# Altium PCB GT502W_M95.PcbDoc (part 1 of 2)
Units mm, origin at the board's own origin, x right, y up, seen from the top; angles counter-clockwise.
Board outline 52.64 x 68.35 mm, 2 copper layers (Top Layer, Bottom Layer), stack 0.268 mm thick; 151 components, 116 nets, 541 pads, 423 vias.
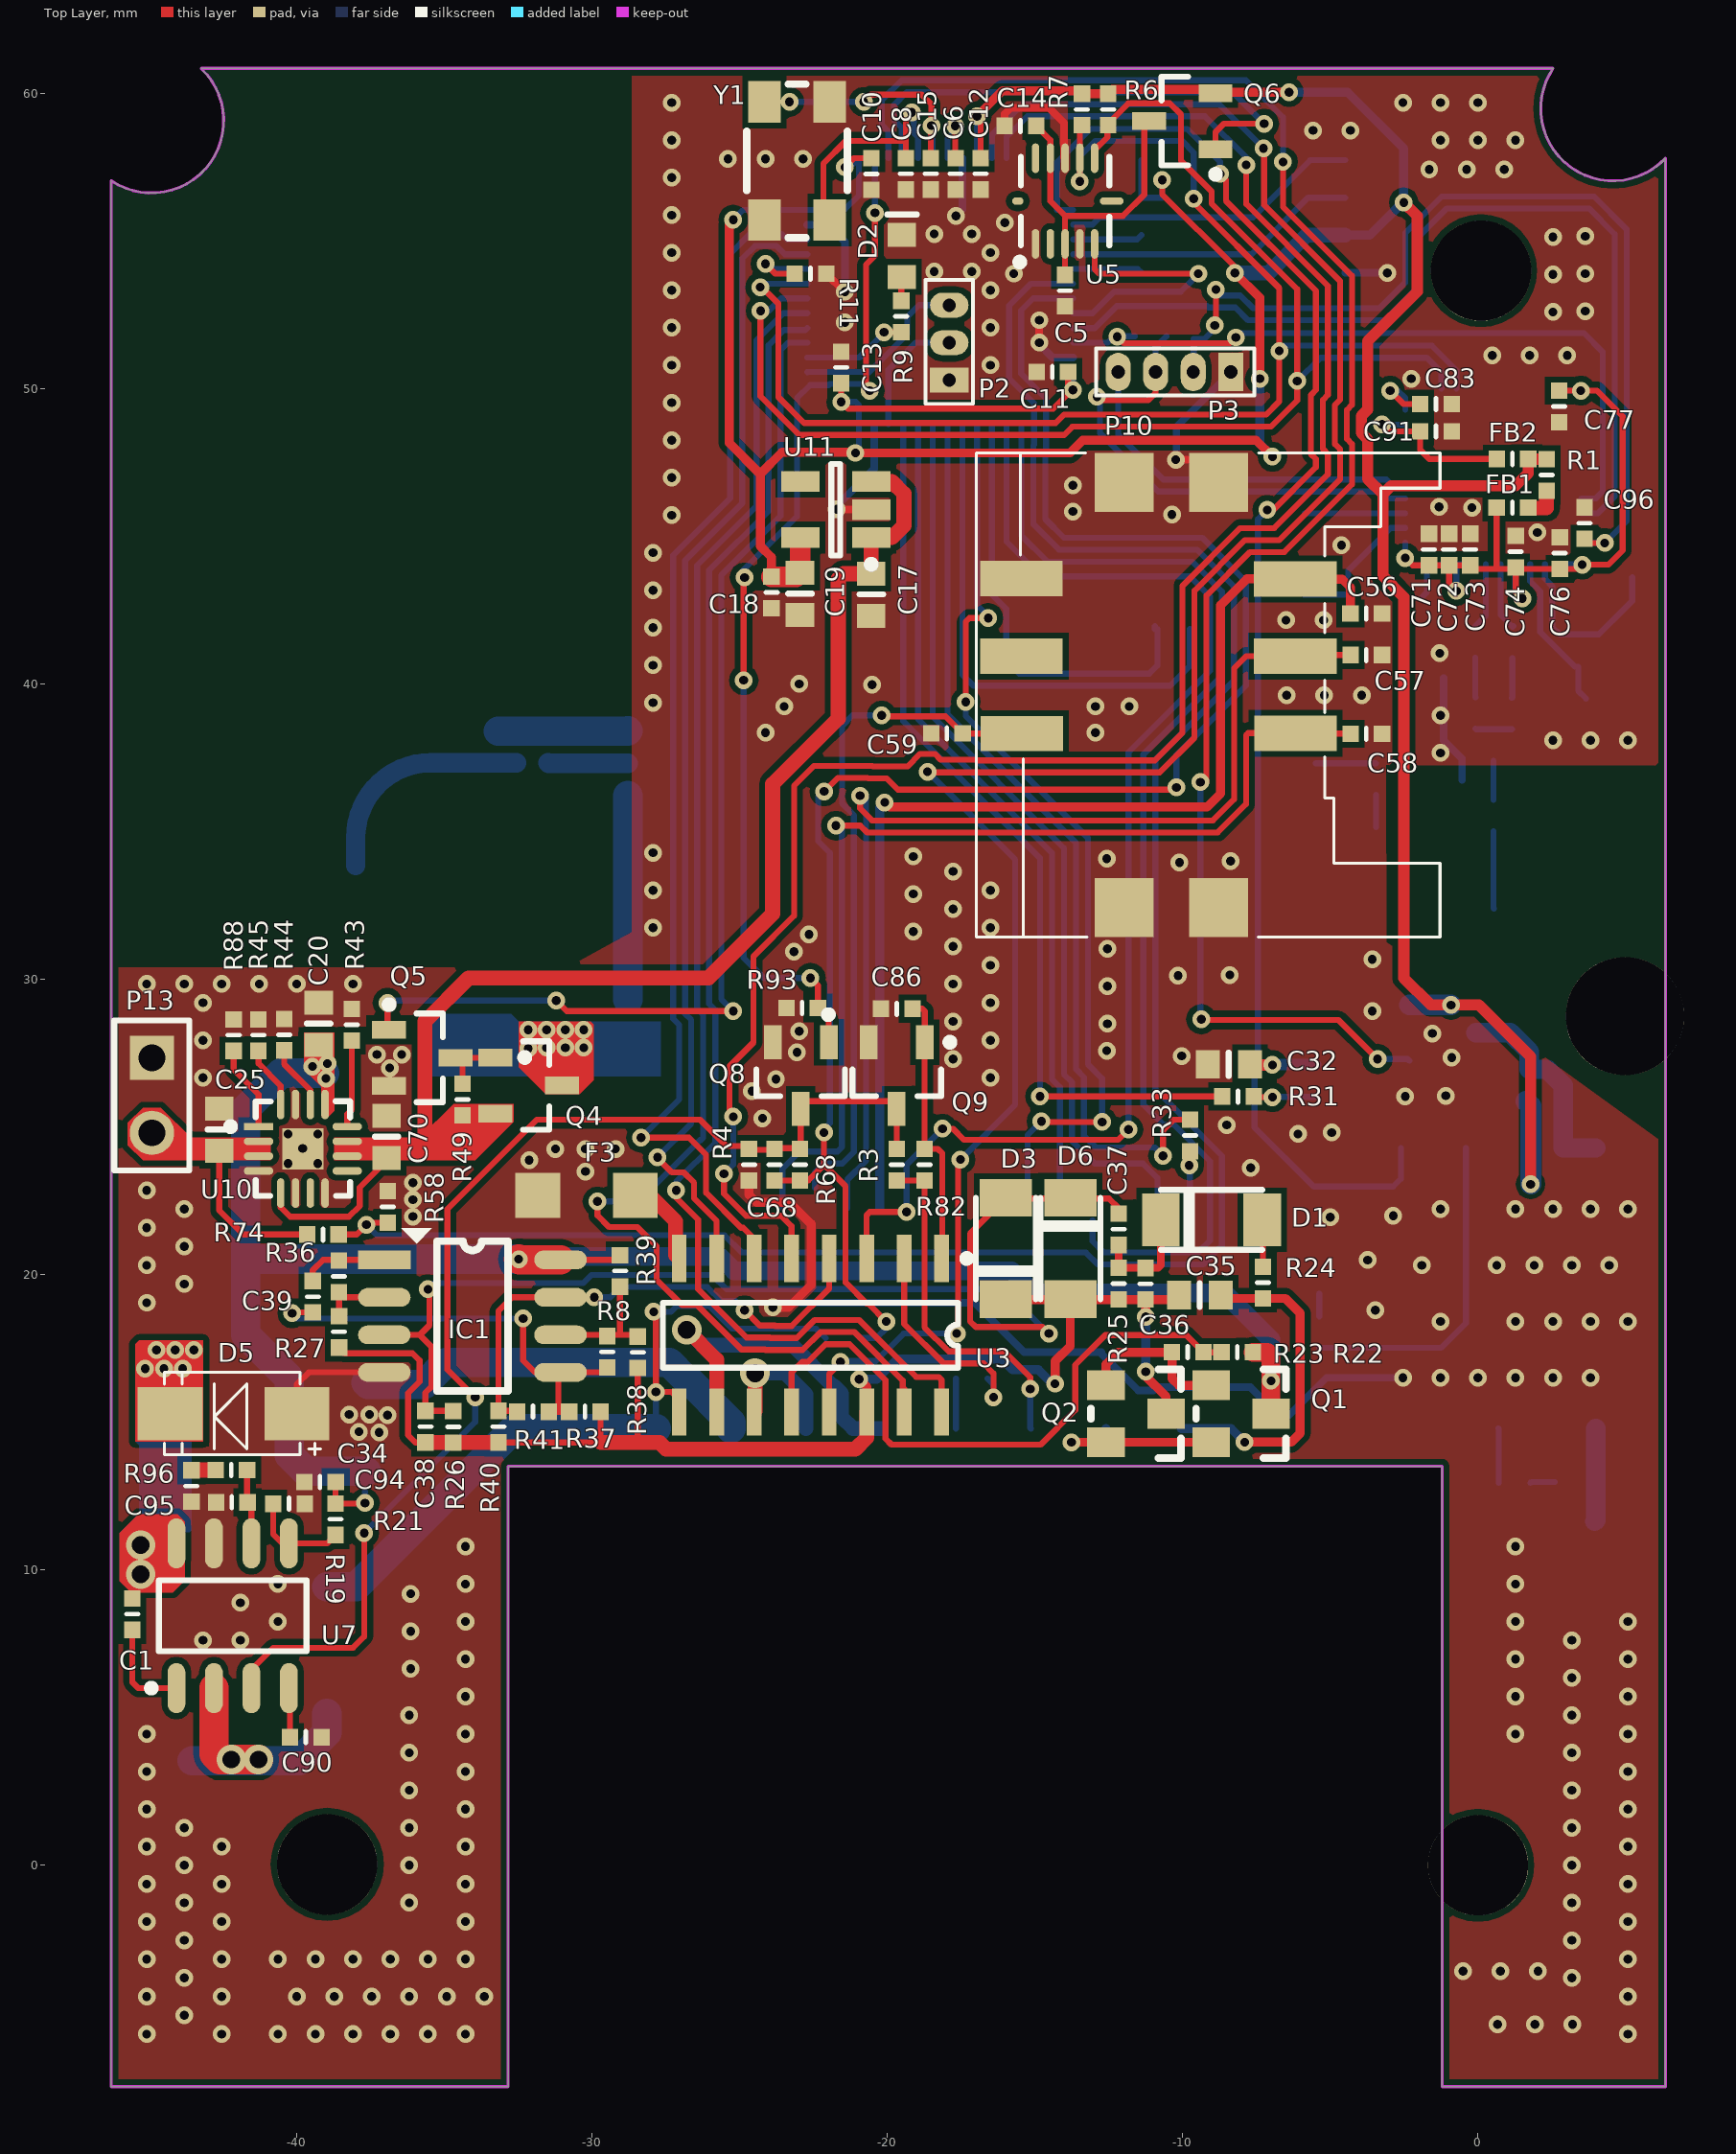
[diagram p0: Top Layer view]
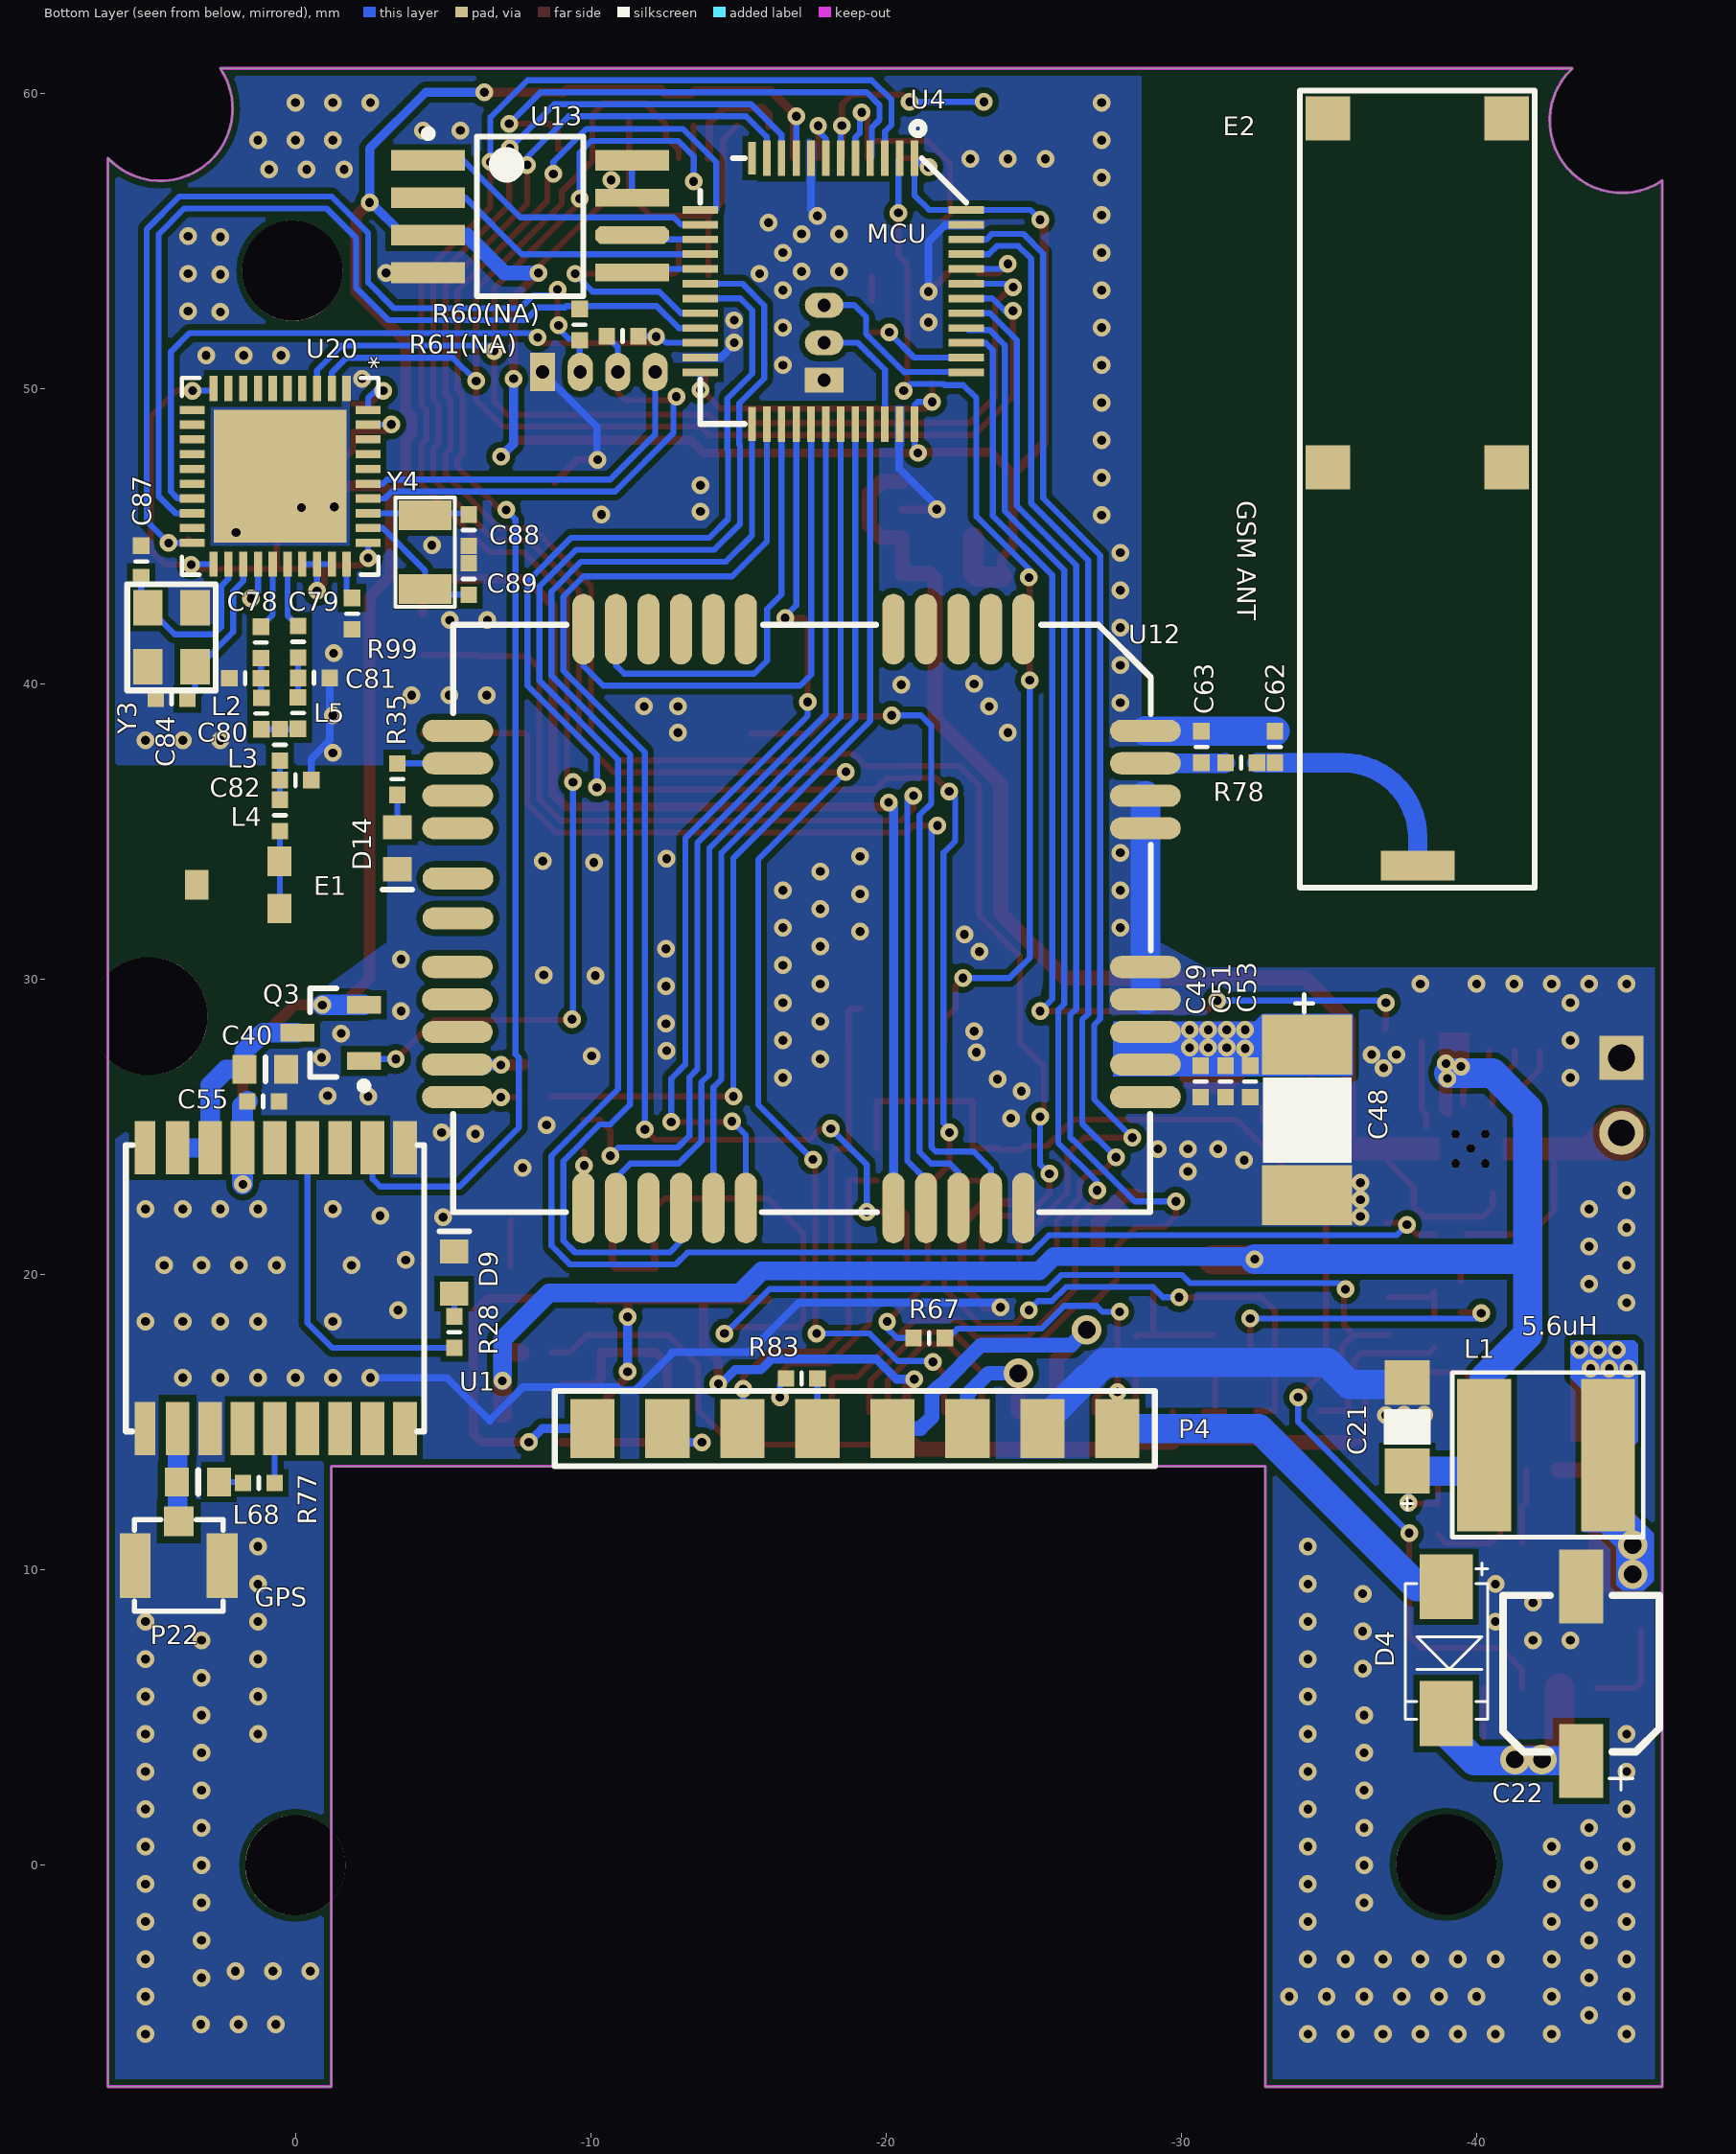
[diagram p1: Bottom Layer view, seen from below]
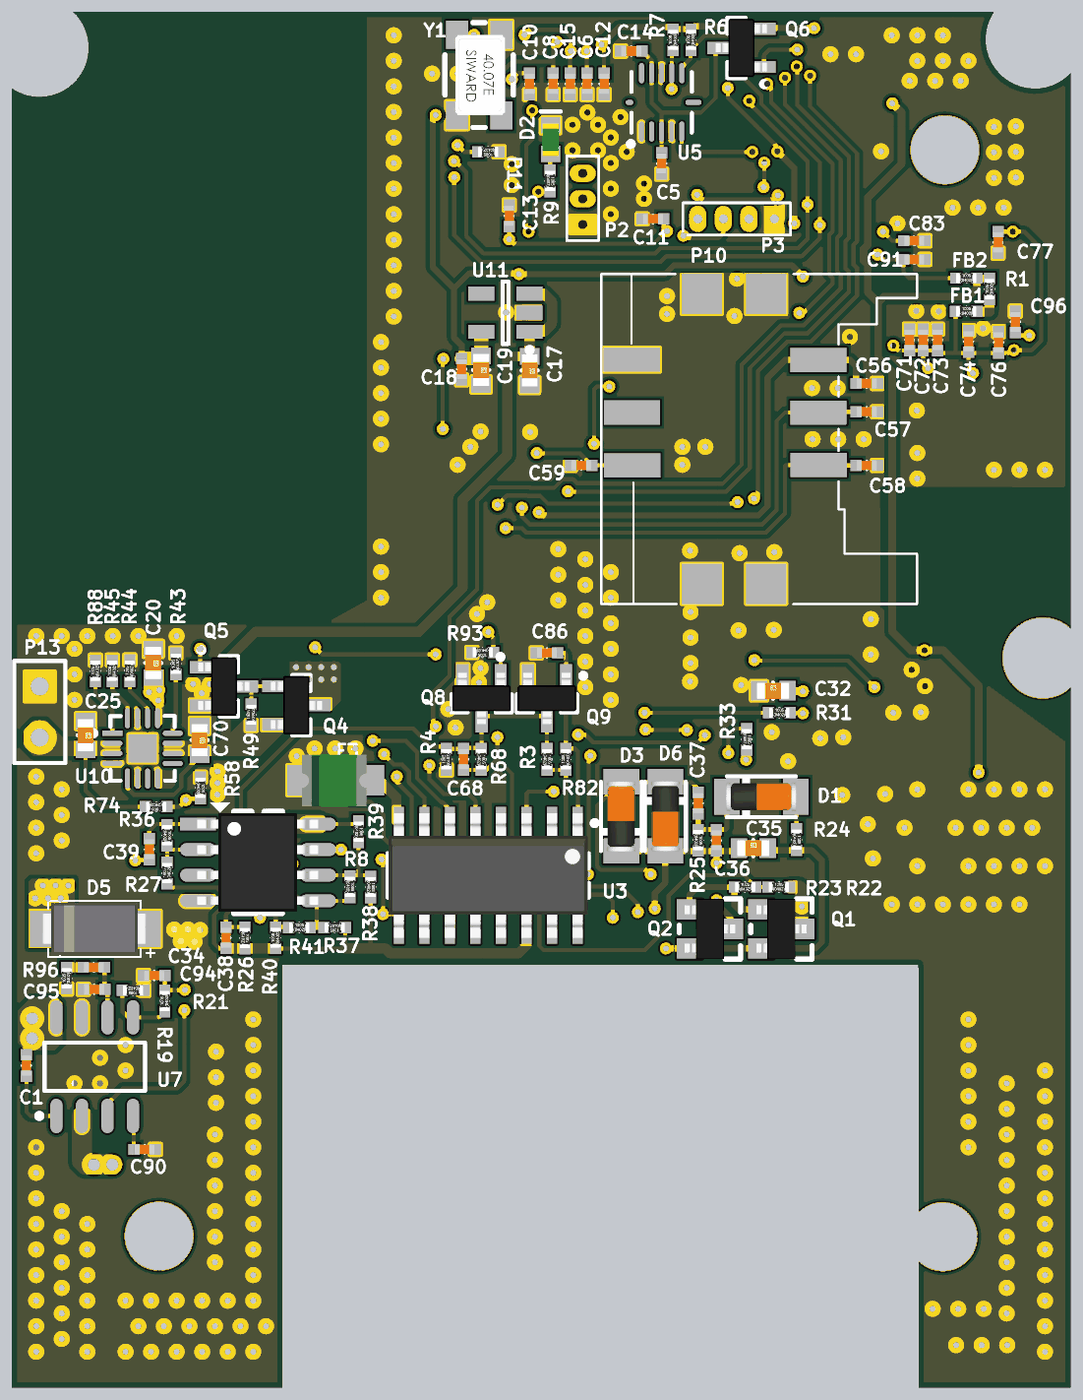
[diagram p3: 3D render of the assembled board from above, using the file's embedded part models]
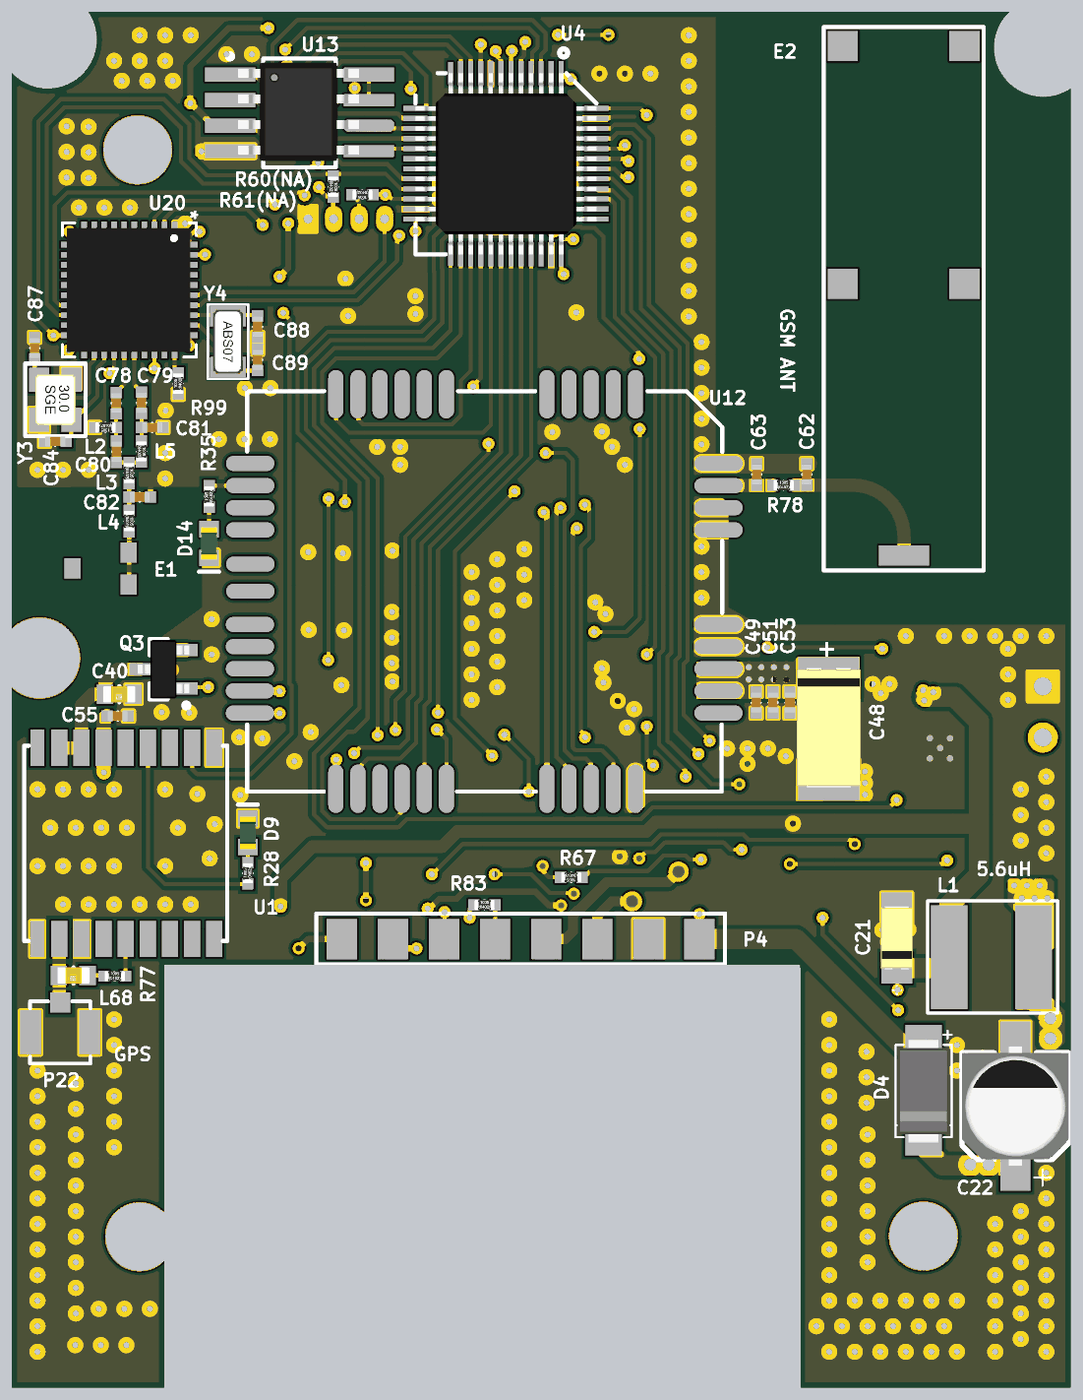
[diagram p4: 3D render of the assembled board from below, using the file's embedded part models]

## Layer stack, top to bottom
Top Layer: signal copper 0.035
Dielectric: core 0.1981, FR-4, Dk 4.2
Bottom Layer: signal copper 0.035

## Board outline
-46.291,-7.497 -46.291,57.048 -46.289,57.048 ccw(c-44.923,59.076) -43.24,60.849 -43.24,60.854 2.543,60.854 2.543,60.852 ccw(c4.57,59.486) 6.343,57.803 6.35,57.797 6.35,-7.497 -1.219,-7.497 -1.219,13.509 -32.842,13.509 -32.842,-7.497

## Design rules (kind name [scope] priority, off if disabled: settings)
Clearance "Schematic Clearance Constraint" [InNet('NetL68_2')] p1: gap=0.254
Clearance [All] p2: gap=0.203
ComponentClearance [All] p1: gap=0 collisioncheckmode=3 verticalgap=0 showdistances=FALSE
HoleSize [All] p1: absolutevalues=TRUE maxlimit=5 minlimit=0.025 maxpercent=80.000 minpercent=20.000
HoleToHoleClearance [All] p1: gap=0.203 allowstackedmicrovias=TRUE
MinimumSolderMaskSliver [All] p1: minsoldermaskwidth=0.003
PolygonConnect pol_conn_style [All vs IsNamedPolygon('Bottom Layer-GND') Or  IsNamedPolygon('Top Layer-GND')] p1: connectstyle=Direct reliefconductorwidth=0.254 reliefentries=4 polygonreliefangle="90 Angle" airgapwidth=0.254
PolygonConnect Pol_Style [All vs IsNamedPolygon('L1_GND') Or  IsNamedPolygon('L3_GND') Or  IsNamedPolygon('L4_GND') Or  IsNamedPolygon('L2_GND')] p2: connectstyle=Direct reliefconductorwidth=0.254 reliefentries=4 polygonreliefangle="90 Angle" airgapwidth=0.254 // V3
PolygonConnect L1-GND-GPS_1 [All vs IsNamedPolygon('L1-GND-GPS')] p3: connectstyle=Direct reliefconductorwidth=0.254 reliefentries=4 polygonreliefangle="90 Angle" airgapwidth=0.254
PolygonConnect L1-L4-GND-POLYGON-STYLE [All vs IsNamedPolygon('L2-GND-PCB') Or  IsNamedPolygon('L4-GND-PCB') Or  IsNamedPolygon('L1-GND-PCB') Or  IsNamedPolygon('L3-GND-PCB')] p4: connectstyle=Direct reliefconductorwidth=0.254 reliefentries=4 polygonreliefangle="90 Angle" airgapwidth=0.254
PolygonConnect GPS-PAD-L1 [All vs IsNamedPolygon('L1-GPS-PAD')] p5: connectstyle=Direct reliefconductorwidth=0.254 reliefentries=4 polygonreliefangle="90 Angle" airgapwidth=0.254
PolygonConnect "GPS PAD" [All vs IsNamedPolygon('L4-GPS-PAD')] p6: connectstyle=Direct reliefconductorwidth=0.254 reliefentries=4 polygonreliefangle="90 Angle" airgapwidth=0.254
PolygonConnect [All vs isvia] p7: connectstyle=Direct reliefconductorwidth=0.254 reliefentries=4 polygonreliefangle="90 Angle" airgapwidth=0.254
RoutingVias ThruVia [All] p1: holewidth=0.3 width=0.6 viastyle="Through Hole" minholewidth=0.3 minwidth=0.6 maxholewidth=1 maxwidth=2
SilkToSilkClearance [All] p1: silktosilkclearance=0
SilkToSolderMaskClearance SilkscreenOverComponentPads [IsPad] p1: minsilkscreentomaskgap=0 clearancetoexposedcopper=TRUE
SolderMaskExpansion SolderMaskExpansion_1 [IsVia] p1: expansion=-0.15
SolderMaskExpansion [All] p2: expansion=0.102
Width "Schematic Width Constraint" [InNet('NetL68_2')] p1: maxlimit=0.66 minlimit=0.66 preferedwidth=0.66
Width [All] p2: maxlimit=1 minlimit=0.203 preferedwidth=0.203
22 further rules are at their usual default settings.

## Classes and differential pairs
component class "Power Supply": C1 C17 C18 C19 C20 C21 C22 C25 C34 C70 C90 C94 C95 D4 D5 L1 P13 Q4 Q5 R19 R21 R43 R44 R45 R49 R58 R74 R88 R96 U7 U10 U11
component class Main: Buzzer1 C5 C6 C8 C10 C11 C12 C13 C14 C15 C35 C36 C37 C38 C39 C68 C71 C72 C73 C74 C76 C77 C78 C79 C80 C81 C82 C83 C84 C86 C87 C88 C89 C91 C96 D1 D2 D3 D6 E1 F3 FB1 FB2 IC1 L2 L3 L4 L5 P2 P3 P4 Q1 Q2 Q6 Q8 Q9 R1 R3 R4 R6 R7 R8 R9 R11 R22 R23 R24 R25 R26 R27 R36 R37 R38 R39 R40 R41 R60(NA) R61(NA) R67 R68 R82 R83 R93 R99 U3 U4 U5 U13 U20 Y1 Y3 Y4
component class GSM/GPS: C32 C40 C41 C48 C49 C51 C53 C55 C56 C57 C58 C59 C62 C63 D9 D14 E2 L68 L69 P10 P22 Q3 R28 R31 R33 R35 R77 R78 U1 U12 U33

## Components (designator, comment, footprint, x,y, rotation, side; value= is the part's Value field where it differs from the comment)
C1 "100nF" C0402 -45.573,8.504 r270 top
C5 "100nF-16V-20%" C0402 -13.984,53.326 r90 top
C6 "100nF-16V-20%" C0402 -17.69,57.279 r270 top
C8 "15p-50V-5%" C0402 -19.377,57.279 r90 top
C10 "100nF-16V-20%" C0402 -20.549,57.277 r270 top
C11 "100nF-16V-20%" C0402 -14.414,50.567 r180 top
C12 "100nF-16V-20%" C0402 -16.847,57.279 r270 top
C13 "100nF-16V-20%" C0402 -21.565,50.724 r90 top
C14 "100nF-16V-20%" C0402 -15.494,58.903 r0 top
C15 "15p-50V-5%" C0402 -18.534,57.279 r270 top
C17 "1uF-16V-20%" C0603 -20.549,43.739 r270 top
C18 "100nF-16V-20%" C0402 -23.927,43.104 r90 top
C19 "1uF-16V-20%" C0603 -22.962,43.764 r270 top
C20 "1uF-16V-20%" C0603 -39.262,29.206 r270 top
C21 "4.7uF" C1206 -37.653,13.447 r90 bottom
C22 "10uF, 35v" "CAPACITOR SIZE_C(D5.3)" -43.544,3.54 r90 bottom
C25 "10uF-6V3-20%" C0603 -42.627,25.617 r270 top
C32 "4.7uF-10V" C0603 -9.144,27.127 r0 top
C34 "1nF-5%" C0402 -42.22,13.386 r0 top
C35 "0.1uF-50V" C0603 -10.131,19.306 r0 top
C36 "3.3nF-10%" C0402 -11.264,19.693 r270 top
C37 "10nF-10%" C0402 -12.168,21.539 r90 top
C38 "2.2nF-10%" C0402 -35.647,14.853 r90 top
C39 "100nF-16V-20%" C0402 -39.46,19.255 r90 top
C40 "10uF-6V3-20%" C0603 0.307,26.953 r0 bottom
C48 "470u-6.3V" C1812 -34.265,27.788 r270 bottom
C49 "100nF-16V-20%" C0402 -30.658,26.543 r270 bottom
C51 "10nF-16V" C0402 -31.496,26.543 r90 bottom
C53 "33pF 50V 5%" C0402 -32.334,26.543 r270 bottom
C55 "100nF-16V-20%" C0402 1.093,25.871 r180 bottom
C56 "100nF-16V-20%" C0402 -3.785,42.393 r0 top
C57 "47p-50V-5%" C0402 -3.784,40.986 r180 top
C58 "47p-50V-5%" C0402 -3.784,38.321 r180 top
C59 "47p-50V-5%" C0402 -17.983,38.329 r0 top
C62 "0.5pF" C0402 -33.172,37.871 r270 bottom
C63 "0.5pF" C0402 -30.683,37.871 r270 bottom
C68 "100nF-16V-20%" C0402 -23.825,23.724 r270 top
C70 "10uF-6V3-20%" C0603 -36.96,25.376 r270 top
C71 "100nF-16V-20%" C0402 -1.662,44.556 r90 top
C72 "100nF-16V-20%" C0402 -0.978,44.556 r90 top
C73 "100nF-16V-20%" C0402 -0.266,44.556 r90 top
C74 "100nF-16V-20%" C0402 1.276,44.486 r90 top
C76 "100nF-16V-20%" C0402 2.77,44.436 r90 top
C77 "100nF-16V-20%" C0402 2.743,49.403 r270 top
C78 "18pF" C0402 1.168,41.412 r270 bottom
C79 "18pF" C0402 -0.094,41.432 r270 bottom
C80 "" C0402 1.15,39.002 r270 bottom
C81 "" C0402 -0.626,40.21 r180 bottom
C82 "" C0402 -0.006,36.748 r180 bottom
C83 "1uF-6V3-20%" C0402 -1.425,49.483 r0 top
C84 "15pF" C0402 4.194,39.512 r180 bottom
C86 "100nF-16V-20%" C0402 -19.685,29.007 r0 top
C87 "15pF" C0402 5.221,44.152 r270 bottom
C88 "18pF" C0402 -5.867,45.212 r90 bottom
C89 "18pF" C0402 -5.867,43.561 r270 bottom
C90 "10nF-10%" C0402 -39.697,4.339 r180 top
C91 "100nF-16V-20%" C0402 -1.425,48.556 r180 top
C94 "100nF" C0402 -39.214,12.98 r0 top
C95 "9pF" C0402 -42.204,12.29 r0 top
C96 "10nF-16V" C0402 3.605,45.452 r270 top
D1 "1N4148" DO-213AA -7.309,21.856 r180 top
D2 "LED GREEN" LED0603-G -19.51,54.504 r90 top
D3 "1N4148" DO-213AA -15.99,22.6 r270 top
D4 "1N4007" "DO-214AC (SMA)" -39.48,8.536 r270 bottom
D5 "B340A" "DO-214AC (SMA)" -40.894,14.8 r180 top
D6 "1N4148" DO-213AA -13.798,19.171 r90 top
D9 "LED GREEN" LED0603-G -5.377,20.07 r90 bottom
D14 "LED GREEN" LED0603-G -3.454,34.442 r270 bottom
E1 "Antenna" A10192-ANTENOVA 1.942,33.201 r0 bottom
E2 "GSM Antena conecter" A10343-GSM850/900/1800/1900/WCDMA -41.968,47.343 r90 bottom
F3 "PTS120616V025" PTC1206 -30.189,22.68 r180 top
FB1 "102" R0402#1 1.165,45.975 r0 top
FB2 "102" R0402#1 1.168,47.625 r0 top
IC1 "LM358" soic8 -37.039,20.503 r0 top locked
L1 "SD8350-5R6-R" SD8350-5R6-R -42.354,13.89 r270 bottom
L2 "2nH" R0402#1 1.701,40.203 r0 bottom
L3 "1nH" R0402#1 0.525,37.942 r270 bottom
L4 "3nH" R0402#1 0.525,35.554 r270 bottom
L5 "2nH" R0402#1 -0.085,39.018 r270 bottom
L68 "47nH" C0603 2.591,12.979 r0 bottom
P2 "Debug" HEADER_1.27mm_3PIN -17.907,50.292 r90 top
P3 "ble_dbg" HEADER_1.27mm_4PIN -10.915,50.57 r180 top locked
P4 "Header 8" HDR1X8 -27.836,14.79 r0 bottom locked
P10 "SIM CARD HOLDER" "SIM MF01-412-063X" -16.986,39.635 r180 top locked
P13 "BAT" HDR1X2 -44.909,27.342 r270 top
P22 "IPEX" IPEX 3.951,10.898 r0 bottom
Q1 "J3Y" SOT23_123 -9.042,16.256 r270 top
Q2 "2TY" SOT23_123 -12.598,16.256 r270 top
Q3 "BSS84" SOT23-3 -1.194,28.194 r0 bottom
Q4 "AO3401A" SOT23-3 -32.149,26.406 r0 top
Q5 "BSS138" SOT23-3 -35.752,27.344 r0 top
Q6 "BSS84" SOT23-3 -10.015,59.065 r180 top
Q8 "BSS138" SOT23-3 -22.936,26.746 r270 top
Q9 "BSS138" SOT23-3 -19.685,26.746 r270 top
R1 "0.022R-1%" R0402#1 2.324,47.083 r90 top
R3 "105k-1%" R0402#1 -19.685,23.724 r270 top
R4 "26.1k-1%" R0402#1 -24.689,23.724 r90 top
R6 "4k7-5%" R0402#1 -12.522,59.461 r90 top
R7 "4k7-5%" R0402#1 -13.411,59.461 r90 top
R8 "220k-5%" R0402#1 -29.486,17.39 r270 top
R9 "1k-5%" R0402#1 -19.533,52.451 r270 top
R11 "10k-5%" R0402#1 -22.606,53.899 r180 top
R19 "38.3k-1%" R0402#1 -38.694,11.717 r90 top
R21 "10k-1%" R0402#1 -40.266,12.244 r180 top
R22 "1k-5%" R0402#1 -8.153,17.374 r0 top
R23 "1k-5%" R0402#1 -9.83,17.374 r0 top
R24 "330k-5%" R0402#1 -7.281,19.731 r270 top
R25 "470k-1%" R0402#1 -12.171,19.701 r270 top
R26 "470k-5%" R0402#1 -34.705,14.845 r270 top
R27 "330R-5%" R0402#1 -38.572,18.065 r90 top
R28 "1k-5%" R0402#1 -5.38,18.056 r90 bottom
R31 "1k-5%" R0402#1 -8.128,26.035 r0 top
R33 "1k-5%" R0402#1 -9.754,24.714 r270 top
R35 "1k-5%" R0402#1 -3.454,36.779 r90 bottom
R36 "220k-5%" R0402#1 -38.58,19.945 r270 top
R37 "2.2M-5%" R0402#1 -30.245,15.361 r180 top
R38 "10k-5%" R0402#1 -28.456,17.375 r270 top
R39 "10k-5%" R0402#1 -29.056,20.125 r270 top
R40 "10k-5%" R0402#1 -33.176,14.855 r90 top
R41 "470k-5%" R0402#1 -32.002,15.358 r0 top
R43 "1k1-5%" R0402#1 -38.14,28.464 r90 top
R44 "47k-5%" R0402#1 -40.43,28.126 r90 top
R45 "3k-5%" R0402#1 -41.3,28.114 r90 top
R49 "10k-5%" R0402#1 -34.392,25.933 r90 top
R58 "100k-5%" R0402#1 -36.921,22.297 r270 top
R60(NA) "1k-5%" R0402#1 -9.627,52.172 r270 bottom
R61(NA) "1k-5%" R0402#1 -11.082,51.782 r0 bottom
R67 "100k-5%" R0402#1 -21.463,17.856 r0 bottom
R68 "10k-1%" R0402#1 -22.962,23.724 r270 top
R74 "100k-5%" R0402#1 -39.116,21.361 r180 top
R77 "10R-5%" R0402#1 1.237,12.945 r180 bottom
R78 "0R" R0402#1 -32.029,37.338 r180 bottom
R82 "10k-5%" R0402#1 -18.745,23.724 r90 top
R83 "10k-5%" R0402#1 -17.145,16.485 r180 bottom
R88 "10k-5%" R0402#1 -42.14,28.114 r90 top
R93 "100k-5%" R0402#2 -22.885,29.032 r90 top
R96 "64.9k-1%" R0402#1 -43.57,12.844 r90 top
R99 "56k-5%" R0402#1 -1.92,42.386 r90 bottom
U1 "L70R" MAX7 0.69,19.544 r180 bottom
U3 "ULN2003A/SO" SO16-150mil -22.608,17.949 r180 top locked
U4 "STM32F103CBT6TR" TQFP-48-P0.5 -18.214,53.309 r270 bottom locked
U5 "MMA7660FC" MMA7660FC -13.984,56.359 r90 top locked
U7 "TPS54232" SOIC127P600-8AL -42.174,8.45 r90 top
U10 "bq24073" pq24073 -39.795,24.265 r0 top
U11 "XC6209B332MRN_SOT-25" SOT23-5 -21.749,45.909 r180 top
U12 "M95" M95 -17.136,32.059 r180 bottom locked (schematic designator U1)
U13 "MX25L8005MC-15G_SOP-8L" SO8-200mil -7.949,55.837 r180 bottom locked
U20 "CC2540_RHA_40" CC254x 0.516,47.035 r180 bottom locked
Y1 "8.000 MHZ" "SMD CRYSTAL 4 X 2.5" -23.061,57.717 r270 top
Y3 "32Mhz" "SMD CRYSTAL 2.5 x 2" 4.194,41.586 r270 bottom
Y4 "NX3215SA MUA-8 12.5pF" Crystal-3.2x1.5 -4.394,45.72 r270 bottom

## Footprints (in the part's own frame and the unit in brackets; to place one, negate y for a bottom-side part, rotate by r counter-clockwise, add the part's x,y. Pads: shape width x height; smd on the part's side, far side on the other; paste and mask are expansions set on the pad)
A10192-ANTENOVA [mm]
  rect 0.8x1 smd: 1(-1.4,-0.8) 1(-1.4,0.8) 2(1.4,0)
  body extent -2,-1.52 2,1.48, height 1.3
A10343-GSM850/900/1800/1900/WCDMA [mm] "http://www.antenova-m2m.com/products/giganova-standard-antennas"
  rect 1x2.5 smd: 1(-13.49,3.96)
  rect 1.5x1.5 smd: 2(11.81,0.95) 3(11.81,7) 4(0,7) 5(0,0.95)
  silkscreen extent -14.24,0 12.76,7.95, body extent -14.25,0 12.76,7.95, height 3.3
C0402 [mil]
  rect 22x22 smd: 1(-21,0) 2(21,0)
  silkscreen extent 0,-8 0,8, body extent -20,-10 20,10, height 20
C0603 [mil]
  rect 32x38 smd: 1(0,0) 2(56,0)
  silkscreen extent 28,-16 28,16, body extent -4,-16 59,16, height 12
C1206 [mil]
  rect 60x60 smd: 1(-3.93,0) 2(114.18,0)
  silkscreen extent -55,-31 79,32, body extent -8,-31 118,31, height 63
C1812 [mil]
  rect 80x120 smd: 1(0,0) 2(200.6,0)
  silkscreen extent -67,-59 158,59, body extent -20,-63 216,63, height 99
"CAPACITOR SIZE_C(D5.3)" [mm]
  rect 2.5x1.5 smd: 1(0,0) 2(5.9,0)
  silkscreen extent -1,-2.65 5.6,2.65, body extent 0,-2.65 5.9,2.65, height 5.4
CC254x [mm]
  rect 0.28x0.85 smd: 1(2.25,2.975) 2(1.75,2.975) 3(1.25,2.975) 4(0.75,2.975) 5(0.25,2.975) 6(-0.25,2.975) 7(-0.75,2.975) 8(-1.25,2.975) 9(-1.75,2.975) 10(-2.25,2.975) 21(-2.25,-2.975) 22(-1.75,-2.975) 23(-1.25,-2.975) 24(-0.75,-2.975) 25(-0.25,-2.975) 26(0.25,-2.975) 27(0.75,-2.975) 28(1.25,-2.975) 29(1.75,-2.975) 30(2.25,-2.975)
  rect 0.85x0.28 smd: 11(-2.975,2.251) 12(-2.975,1.75) 13(-2.975,1.25) 14(-2.975,0.75) 15(-2.975,0.25) 16(-2.975,-0.25) 17(-2.975,-0.75) 18(-2.975,-1.25) 19(-2.975,-1.75) 20(-2.975,-2.251) 31(2.975,-2.251) 32(2.975,-1.75) 33(2.975,-1.25) 34(2.975,-0.75) 35(2.975,-0.25) 36(2.975,0.25) 37(2.975,0.75) 38(2.975,1.25) 39(2.975,1.75) 40(2.975,2.251)
  rect 4.5x4.5 smd: 41(0,0)
  silkscreen extent -3.33,-3.33 3.33,3.33, body extent -3.1,-3.08 3.05,3.08, height 1.07
Crystal-3.2x1.5 [mm] "DSX321G"
  rect 1x1.8 smd: 1(0,0) 2(2.5,0)
  silkscreen extent -0.6,-1 3.1,1, body extent -0.36,-0.76 2.86,0.76, height 0.93
DO-213AA [mil]
  rect 50x70 smd: 1(0,0) 2(135,0)
  silkscreen extent 0,-40 135,40, body extent -1,-29 137,28, height 56
"DO-214AC (SMA)" [mm]
  rect 2.2x1.8 smd: 1(-0.899,-0.5) 2(3.397,-0.5)
  silkscreen extent -1.7,-1.9 3.6,0.9, body extent -1.3,-1.8 3.9,0.8, height 2.3
HDR1X2 [mm] "Connector; Header; 2 Position"
  rect 1.5x1.5 hole 0.9: 1(0,0)
  round 1.5 hole 0.9: 2(2.54,0)
  silkscreen extent -1.27,-1.27 3.81,1.27
HDR1X8 [mm] "Connector; Header; 8 Position"
  rect 1.5x2 smd: 1(0,0) 2(2.54,0) 3(5.08,0) 4(7.62,0) 5(10.16,0) 6(12.7,0) 7(15.24,0) 8(17.78,0)
  silkscreen extent -1.27,-1.27 19.05,1.27
HEADER_1.27mm_3PIN [mm]
  rect 0.85x1.3 hole 0.45: 1(0,0)
  oval 0.85x1.3 hole 0.45: 2(1.27,0) 3(2.54,0)
  silkscreen extent -0.8,-0.8 3.4,0.8
HEADER_1.27mm_4PIN [mm]
  rect 0.85x1.3 hole 0.45: 1(-2.54,0)
  oval 0.85x1.3 hole 0.45: 2(-1.27,0) 3(0,0) 4(1.27,0)
  silkscreen extent -3.34,-0.8 2.02,0.8
IPEX [mm]
  rect 1x1 smd: 1(0,-0.75)
  rect 1.05x2.2 smd: 2(-1.475,0.75) 3(1.475,0.75)
  silkscreen extent -1.5,-0.8 1.5,2.3
LED0603-G [mil]
  rect 32x38 smd: 1(-28,0) 2(28,0)
  silkscreen extent 55,-20 55,19, body extent -32,-16 32,16, height 43
M95 [mm]
  oval 0.75x2.4 smd: 1(7.52,9.8) 2(6.42,9.8) 3(5.32,9.8) 4(4.22,9.8) 5(3.12,9.8) 6(-1.88,9.8) 7(-2.98,9.8) 8(-4.08,9.8) 9(-5.18,9.8) 10(-6.28,9.8) 11(-7.38,9.8) 21(-7.38,-9.8) 22(-6.28,-9.8) 23(-5.18,-9.8) 24(-4.08,-9.8) 25(-2.98,-9.8) 26(-1.88,-9.8) 27(3.12,-9.8) 28(4.22,-9.8) 29(5.32,-9.8) 30(6.42,-9.8) 31(7.52,-9.8)
  oval 2.4x0.75 smd: 12(-11.64,6.36) 13(-11.64,5.26) 14(-11.64,4.16) 15(-11.64,3.06) 16(-11.65,-1.64) 17(-11.65,-2.74) 18(-11.65,-3.84) 19(-11.65,-4.94) 20(-11.65,-6.04) 32(11.65,-6.04) 33(11.65,-4.94) 34(11.65,-3.84) 35(11.65,-2.74) 36(11.65,-1.64) 37(11.65,3.06) 38(11.65,4.16) 39(11.65,5.26) 40(11.65,6.36) 41(-11.63,1.36) 42(-11.63,0.01)
  silkscreen extent -11.79,-9.94 11.83,9.95
MAX7 [mm]
  rect 0.8x1.8 smd: 1(4.4,4.75) 2(3.3,4.75) 3(2.2,4.75) 4(1.1,4.75) 5(0,4.75) 6(-1.1,4.75) 7(-2.2,4.75) 8(-3.3,4.75) 11(-3.3,-4.75) 12(-2.2,-4.75) 13(-1.1,-4.75) 14(0,-4.75) 15(1.1,-4.75) 16(2.2,-4.75) 17(3.3,-4.75) 18(4.4,-4.75)
  rect 0.7x1.8 smd: 9(-4.4,4.75) 10(-4.4,-4.75)
  silkscreen extent -5.05,-4.85 5.05,4.85, body extent -5.05,-4.87 5.07,4.84, height 0.56
MMA7660FC [mm] "QFN, 12-Leads, Body 3,0x3,0mm (max), Pitch 0,50mm, IPC Medium Density"
  oval 1x0.25 smd: 1(-1.45,1) 2(-1.45,0.5) 3(-1.45,0) 4(-1.45,-0.5) 5(-1.45,-1) 6(1.45,-1) 7(1.45,-0.5) 8(1.45,0) 9(1.45,0.5) 10(1.45,1)
  oval 0.25x0.8 smd: 11(0,-1.58)
  oval 0.25x0.381 smd: 12(0,1.6)
  silkscreen extent -2.19,-1.5 1.5,1.66, body extent -1.5,-1.5 1.5,1.5, height 0.9
pq24073 [mm]
  rect 1x0.25 smd: 1(-1.5,0.75)
  oval 1x0.25 smd: 2(-1.5,0.25) 3(-1.5,-0.25) 4(-1.5,-0.75) 9(1.5,-0.75) 10(1.5,-0.25) 11(1.5,0.25) 12(1.5,0.75)
  oval 0.25x1 smd: 5(-0.75,-1.5) 6(-0.25,-1.5) 7(0.25,-1.5) 8(0.75,-1.5) 13(0.75,1.5) 14(0.25,1.5) 15(-0.25,1.5) 16(-0.75,1.5)
  rect 1.4x1.4 smd: 17(0,0)
  silkscreen extent -2.57,-1.6 1.6,1.61, body extent -1.58,-1.57 1.58,1.58, height 1
PTC1206 [mil]
  rect 60x60 smd: 1(-65,0) 2(65,0)
  body extent -60,-50 66,51, height 27
R0402#1 [mil]
  rect 22x22 smd: 1(-21,0) 2(21,0)
  silkscreen extent 0,-8 0,8, body extent -20,-10 20,10, height 14
R0402#2 [mil]
  rect 22x22 smd: 1(0,-21) 2(0,21)
  silkscreen extent -8,0 8,0, body extent -10,-20 10,20, height 14
SD8350-5R6-R [mil] "Using in PJ2000V1"
  rect 202.73x72 smd: 1(0,82.6) 2(0,-82.6)
  silkscreen extent -110,-125 109,130
"SIM MF01-412-063X" [mm] "http://www.fcn.com.tw/zh/product/ProductList.aspx?Type=13"
  rect 2.8x1.2 smd: 1(-10.8,-3.93) 2(-10.8,-1.31) 3(-10.806,1.295) 5(-1.52,-3.94) 6(-1.526,-1.315) 7(-1.54,1.31)
  rect 2x2 smd: 8(-8.2,7.2) 9(-5,-7.2) 10(-8.2,-7.2) 11(-5,7.2)
  silkscreen extent -15.7,-8.2 0,8.2, body extent -15.7,-8.2 0,8.2, height 2.9
"SMD CRYSTAL 2.5 x 2" [mm]
  rect 1.2x1 smd: 1(-0.999,-0.799) 2(0.999,-0.799) 3(0.999,0.799) 4(-0.999,0.799)
  silkscreen extent -1.8,-1.5 1.8,1.5, body extent -1.25,-1 1.25,1, height 0.55
"SMD CRYSTAL 4 X 2.5" [mm]
  rect 1.4x1.1 smd: 1(-2,-1.1) 2(2,-1.1) 3(2,1.1) 4(-2,1.1)
  silkscreen extent -2.6,-1.7 2.6,1.7, body extent -2,-1.2 2,1.3, height 0.63
SO8-200mil [mm] "8-Pin Plastic Medium Body Small Outline Package 1.27 mm Pitch, IPC Low Density"
  rect 2.5x0.7 smd: 1(-3.45,1.905) 2(-3.45,0.635) 3(-3.45,-0.635) 4(-3.45,-1.905) 8(3.45,1.905)
  rect 2.5x0.6 smd: 5(3.45,-1.905) 7(3.45,0.635)
  oct 2.5x0.6 smd: 6(3.45,-0.635)
  silkscreen extent -3.57,-2.7 1.8,2.93, body extent -3.05,-2.4 2.95,2.5, height 1.7
SO16-150mil [mm] "Small Outline; 16 Leads; Body Width 3.9 mm; Pitch 1.27 mm"
  rect 0.5x1.6 smd: 1(-4.445,-2.6) 2(-3.175,-2.6) 3(-1.905,-2.6) 4(-0.635,-2.6) 5(0.635,-2.6) 6(1.905,-2.6) 7(3.175,-2.6) 8(4.445,-2.6) 9(4.445,2.6) 10(3.175,2.6) 11(1.905,2.6) 12(0.635,2.6) 13(-0.635,2.6) 14(-1.905,2.6) 15(-3.175,2.6) 16(-4.445,2.6)
  silkscreen extent -5.42,-2.72 5,1.1, body extent -4.95,-3.1 4.95,3.1, height 1.7
soic8 [mil]
  rect 70x25 smd: 1(0,0)
  oval 70x25 smd: 2(0,-50) 3(0,-100) 4(0,-150) 5(235,-150) 6(235,-100) 7(235,-50) 8(235,0)
  silkscreen extent 23,-175 165,42, body extent -1,-171 235,21, height 69
SOIC127P600-8AL [mm] "SOIC, 8-Leads, Body 4.9x3.9mm, Pitch 1.27mm, IPC High Density"
  oval 1.7x0.6 smd: 1(-2.45,1.905) 2(-2.45,0.635) 3(-2.45,-0.635) 4(-2.45,-1.905) 5(2.45,-1.905) 6(2.45,-0.635) 7(2.45,0.635) 8(2.45,1.905)
  silkscreen extent -2.57,-2.5 1.2,2.88, body extent -2,-2.5 2,2.5, height 2.72
SOT23-3 [mm] "SOT23, 3-Leads, Body 2.9x1.3mm, Pitch 0.95mm, Lead Span 2.4mm, IPC Medium Density"
  rect 1.15x0.6 smd: 1(-1.125,0.95) 2(-1.125,-0.95) 3(1.125,0)
  silkscreen extent -1.25,-1.5 0.7,1.92, body extent -1.27,-1.46 1.28,1.46, height 0.99
SOT23-5 [mm] "SOT23, 5-Leads, Body 2.9x1.6mm, Pitch 0.95mm, Lead Span 2.8mm, IPC Low Density"
  rect 1.3x0.7 smd: 1(-1.2,0.95) 2(-1.2,0) 3(-1.2,-0.95) 4(1.2,-0.95) 5(1.2,0.95)
  silkscreen extent -1.33,-1.55 0.15,1.97, body extent -0.9,-1.55 0.9,1.55, height 1.45
SOT23_123 [mil]
  rect 40x50 smd: 1(0,0) 2(76,0) 3(38,80)
  silkscreen extent -21,-20 97,100, body extent -21,-9 97,89, height 44
TQFP-48-P0.5 [mm] "Thin QFP, 48-Leads, Body 7x7mm, Pitch 0.5mm, IPC Medium Density"
  rect 1.2x0.254 smd: 1(-4.5,2.75) 2(-4.5,2.25) 3(-4.5,1.75) 4(-4.5,1.25) 5(-4.5,0.75) 6(-4.5,0.25) 7(-4.5,-0.25) 8(-4.5,-0.75) 9(-4.5,-1.25) 10(-4.5,-1.75) 11(-4.5,-2.25) 26(4.5,-2.25) 27(4.5,-1.75) 28(4.5,-1.25) 29(4.5,-0.75) 30(4.5,-0.25) 31(4.5,0.25) 32(4.5,0.75) 33(4.5,1.25) 34(4.5,1.75) 35(4.5,2.25) 36(4.5,2.75)
  rect 1.092x0.254 smd: 12(-4.5,-2.75)
  rect 0.254x1.2 smd: 13(-2.75,-4.5) 14(-2.25,-4.5) 15(-1.75,-4.5) 16(-1.25,-4.5) 17(-0.75,-4.5) 18(-0.25,-4.5) 19(0.25,-4.5) 20(0.75,-4.5) 21(1.25,-4.5) 22(1.75,-4.5) 23(2.25,-4.5) 24(2.75,-4.5) 37(2.75,4.5) 38(2.25,4.5) 39(1.75,4.5) 40(1.25,4.5) 41(0.75,4.5) 42(0.25,4.5) 43(-0.25,4.5) 44(-0.75,4.5) 45(-1.25,4.5) 46(-1.75,4.5) 47(-2.25,4.5) 48(-2.75,4.5)
  rect 1.143x0.254 smd: 25(4.5,-2.75)
  silkscreen extent -5.71,-4.5 4.5,4.5, body extent -4.5,-4.5 4.5,4.5, height 1.5

## Part data
C1 C94: library part Cap, "Capacitor"
C5 C6 C10 C11 C12 C13 C14 C18 C39 C49 C55 C56 C68 C71 C72 C73 C74 C76 C77 C86 C91: library part Cap, "CAP CER 0.1UF 16V Y5V 0402"
C8 C15: library part Cap, "CAP CER 15PF 50V 5% NPO 0402"
C17 C19 C20: library part Cap, "CAP CER 1UF 16V Y5V 0603"
C21: library part Cap2, "Capacitor"
C22: library part "Cap Pol3", "CAP ALUM 10UF 35V 20% SMD"
C25 C40 C70: library part Cap, "CAP CER 10UF 6.3V 20% X5R 0603"
C32: library part 4.7uF-10V-C0805, "Non-Polarized Capacitor"
C34: library part 1nF-50V-C0805, "Non-Polarized Capacitor"
C35: library part CN2, "CAP CER 0.1UF 50V Y5V 0603"
C36: library part 1nF-50V-C0805, "CAP CER 3300PF 50V 10% X7R 0402"
C37 C90: library part 10nF-50V-C0805, "Non-Polarized Capacitor"
C38: library part 2.2nF-50V-C0805, "CAP CER 2200PF 50V 10% X7R 0402"
C48: library part "Cap Pol3", "CAP CER 100UF 10V 20% X5R 1812"
C51 C96: library part 10nF-16V-C0402-10%, "CAP CER 10000PF 16V 10% X7R 0402"
C53: library part Cap, "CAP CER 68PF 50V 5% NPO 0402"
C57 C58 C59: library part Cap, "CAP CER 47PF 50V 5% NPO 0402"
C62 C63: library part 0.5pF-50V-C0805, "Non-Polarized Capacitor"
C80 C81 C82: library part 1pF
C83: library part Cap, "CAP CER 1UF 6.3V Y5V 0402"
C95: library part 9pF-50V-C0805, "Non-Polarized Capacitor"
D1 D3 D6: "DIODE SMALL SIG 100V 0.2A ALF2"
D2 D9 D14: library part LED2, "LED GREEN CLEAR THIN 0603 SMD"
D4: library part Diode, "DIODE GEN PURPOSE 1000V 1A SMA"
D5: library part "D Schottky", "DIODE SCHOTTKY 40V 3A SMA"
E1: "Generic Antenna"
E2: library part "Header 5", "Header, 5-Pin"
F3: library part "Fuse 2", "PTC RESETTABLE SMD 1206 16V .25A"
FB1 FB2 L2 L3 L4 L5 L68: library part Inductor, "Inductor"
IC1: "Low-Power Dual Operational Amplifier"
L1: library part Inductor, "Digikey part SD8350-4R7-R"
P2: library part "Header 3", "NA"
P3: library part "Header 4", "Header, 4-Pin"
P4: "Header, 8-Pin"
P10: library part "SIM CARD", "SIM _CONNECTOR_410108105011-2LF"
P13: library part "Header 2", "Header, 2-Pin"
Q1: library part NPN_123, "NPN Bipolar Transistor"
Q2: library part PNP_123, "PNP Bipolar Transistor"
Q3 Q6: library part MOSFET-P, "MOSFET P-CH 50V 130MA SOT23-3"
Q4: library part MOSFET-P, "MOSFET P-CH -30V -4.3A SOT23"
Q5 Q8 Q9: library part MOSFET-P, "MOSFET N-CH 50V 200MA SOT23-3"
R1: library part 0.022R-1%-R0805, "RES 0.022 OHM 1/4W 1% 0805 SMD"
R3: library part 105k-1%-R0805, "RES 105k OHM 1/4W 1% 0805 SMD"
R4: library part 26.1k-1%-R0805, "RES 26.1k OHM 1/4W 1% 0805 SMD"
R6 R7: library part Res1, "RES 4.7K OHM 1/16W 5% 0402 SMD"
R8 R36: library part 220k-5%-R0805, "RES 220k OHM 1/8W 5% 0805 SMD"
R9 R28 R31 R33 R35 R60(NA) R61(NA): library part Res1, "RES 1.0K OHM 1/16W 5% 0402 SMD"
R11 R49 R82 R83 R88: library part Res1, "RES 10K OHM 1/16W 5% 0402 SMD"
R19: library part 38.3k-1%-R0805, "RES 38.3k OHM 1/4W 1% 0805 SMD"
R21: library part 10k-1%-R0805, "RES 10k OHM 1/4W 1% 0805 SMD"
R22 R23: library part 1k-5%-R0805, "RES 1k OHM 1/8W 5% 0805 SMD"
R24: library part 330k-5%-R0805, "RES 330k OHM 1/8W 5% 0805 SMD"
R25: library part 470k-1%-R0805, "RES 470k OHM 1/4W 1% 0805 SMD"
R26 R41: library part 470k-5%-R0805, "RES 470k OHM 1/8W 5% 0805 SMD"
R27: library part 330R-5%-R0805, "RES 330 OHM 1/8W 5% 0805 SMD"
R37: library part 2.2M-5%-R0805, "RES 2.2M OHM 1/8W 5% 0805 SMD"
R38 R39 R40: library part 10k-5%-R0805, "RES 10k OHM 1/8W 5% 0805 SMD"
R43: library part Res1, "RES 1.1K OHM 1/16W 5% 0402 SMD"
R44: library part Res1, "RES 47K OHM 1/16W 5% 0402 SMD"
R45: library part Res1, "RES 1.5K OHM 1/16W 5% 0402 SMD"
R58 R67 R74 R93: library part Res1, "RES 100K OHM 1/16W 5% 0402 SMD"
R68: library part Res1, "RES 10.0K OHM 1/16W 1% 0402 SMD"
R77: library part 10R-5%-R0402, "RES 10 OHM 1/16W 5% 0402 SMD"
R78: library part 0R-0805
R96: library part 64.9k-1%-R0805, "RES 64.9k OHM 1/4W 1% 0805 SMD"
R99: library part 56k-5%-R0805, "RES 56k OHM 1/8W 5% 0805 SMD"
U1: library part MAX-7
U3: library part ULN2003A/SO_0, "IC DARL TRANS ARRAY 16-SOIC"
U4: library part ATmega128_4, "MCU ARM 128K FLASH/TIMER"
U5: "ACCELEROMETER 3X3 DGTL 10-DFN"
U7: library part Component_1
U10: library part BATTERY_CHARGER, "IC LI-ION CHARGE/PWR MGMT 16-QFN"
U13: library part FlashIC
U20: "2.4GHz Bluetooth Low Energy System-on-Chip Solution"
Y1: library part CRYSTAL-SMT, "CRYSTAL 8.000 MHZ 18PF SMD"
Y3: library part XTAL
Y4: library part XTAL/32KHz, "Crystal Oscillator"

## Free pads (board coordinates)
  round 3.4 hole 3.4: 0(0.1,54) 1(0,0) 2(-38.974,0.03)
  round 4 hole 4: 0(4.977,28.752)

## Via types
v1: diameter 0.6, hole 0.3, Top Layer to Bottom Layer, 412 vias
v2: diameter 1, hole 0.6, Top Layer to Bottom Layer, 6 vias
v3: diameter 0.3, hole 0.3, Top Layer to Bottom Layer, tented top, 5 vias

## Nets (pads, with @x,y where several pads share a name; then routed paths per layer and width w, separated by ;. In a path a pad name is that pad's centre, name@x,y a point inside that pad or via, vN(x,y) a via of type N, cw(c..) or ccw(c..) an arc to the next point about the centre after c; other vN are vias at no path point)
2V8: C32.2 U12.19 | length 2.3
  Top Layer w0.381: C32.2@-7.722,27.127 -7.696,27.102 v1(-6.96,27.102)
  Bottom Layer w0.381: v1(-6.96,27.102) -6.942,27.119 U12.19@-5.486,27.119
3V3: C10.1 C11.1 C12.1 C13.1 C18.2 C19.1 C55.1 FB2.2 Q3.2 Q6.2 R1.2 R6.2 R7.2 U1.6 U4.1 U4.9 U4.24 U4.36 U4.48 U11.5 U13.3 U13.7 U13.8 | length 141.9
  Top Layer w0.203: C13.1@-21.565,50.19 v1(-21.565,49.555) -21.341,49.332 -14.388,49.332 -13.757,49.962 v1(-13.716,49.962) -13.881,50.126 C11.1@-13.881,50.567 ; v1(-21.438,57.506) -21.133,57.81 C10.1@-20.549,57.81 ; v1(-16.967,59.233) -16.847,59.113 C12.1@-16.847,57.812 ; v1(-10.693,57.074) -10.693,56.591 -8.271,54.169 -8.271,53.965 v1(-8.23,53.924)
  Top Layer w0.305: v1(-25.222,55.728) -25.36,55.59 -25.36,48.169 -24.308,47.117 ; C18.2@-23.927,43.637 -23.927,44.298 -24.308,44.679 -24.308,47.117 ; v1(-16.967,59.233) -16.104,60.096 -13.513,60.096 R7.2@-13.411,59.995 R6.2@-12.522,59.995 -12.379,60.138 -9.186,60.138 -9.053,60.005 -9.012,60.046 v1(-6.401,60.046) ; v1(-8.23,53.924) -7.391,53.086 v1(-7.391,50.343) ; v1(-6.96,47.701) -7.518,48.26 -13.386,48.26 -13.818,47.828 -20.955,47.828 -20.955,47.854 -23.571,47.854 -24.308,47.117
  Top Layer w0.381: v1(-2.515,56.312) -2.057,55.855 -2.057,53.289 -3.734,51.613 -3.734,49.292 -3.945,49.081 -3.945,48.506 -3.734,48.295 -3.734,46.949 -3.221,46.436 ; v1(1.778,23.063) 1.778,27.381 0.025,29.134 v1(-0.914,29.134) -1.6,29.134 -2.514,30.047 -2.514,42.951 -3.221,43.658 -3.221,46.436 ; R1.2@2.324,47.616 1.711,47.616 FB2.2@1.702,47.625 1.702,47.142 1.271,46.712 -2.945,46.712 -3.221,46.436
  Top Layer w0.7: C18.2@-23.927,43.637 -23.089,43.637 C19.1@-22.962,43.764 -22.962,44.946 U11.5@-22.949,44.959
  Bottom Layer w0.203: v1(-25.222,55.728) -24.891,56.059 U4.48@-22.714,56.059 -21.462,56.059 -20.964,56.557 U4.1@-20.964,57.809 -21.268,57.506 v1(-21.438,57.506) ; v1(-21.565,49.555) -21.074,49.555 -20.964,49.446 U4.36@-20.964,48.809 v1@-20.964,47.946 ; v1(-21.082,47.828) v1@-20.964,47.946 ; v1@-20.955,47.828 -20.964,47.837 v1@-20.964,47.946 ; v1(-16.967,59.233) -16.964,59.23 U4.9@-16.964,57.809 ; v1(-13.716,49.962) -13.714,49.964 U4.24@-13.714,50.559 ; U13.8@-11.399,57.742 U13.7@-11.399,56.472 -10.693,56.472 v1(-10.693,57.074)
  Bottom Layer w0.305: v1(-7.391,50.343) -7.391,48.133 v1(-6.96,47.701) ; v1(-6.401,60.046) -4.42,60.046 -2.515,58.141 -2.515,56.354 -3.666,55.202 U13.3@-4.499,55.202
  Bottom Layer w0.508: v1(-8.23,53.924) -7.087,53.924 -5.809,55.202 U13.3@-4.499,55.202 ; v1(-2.515,56.312) v1@-2.515,56.354
  Bottom Layer w0.7: Q3.2@-2.319,29.144 -0.925,29.144 v1(-0.914,29.134) ; C55.1@1.626,25.871 1.79,25.707 U1.6@1.79,24.294 1.79,23.075 v1(1.778,23.063)
4V4: C17.1 C70.2 Q4.2 R49.1 U10.5 U10.10 U10.11 U11.1 U11.3 | length 41.1
  Top Layer w0.203: U10.5@-40.545,22.765 -40.545,22.282 -40.223,21.96 -38.238,21.96 -37.871,22.327 -37.871,22.956 -36.96,23.867 C70.2@-36.96,23.954
  Top Layer w0.508: -35.659,24.539 -35.659,28.578 -34.188,30.048 -26.06,30.048 -23.889,32.22 -23.889,36.614 -21.666,38.837 -21.666,43.561 -21.488,43.739 C17.1@-20.549,43.739 ; C17.1@-20.549,43.739 U11.1@-20.549,44.959 -19.852,44.959 -19.442,45.37 -19.442,46.448 -19.852,46.859 U11.3@-20.549,46.859
5V: C20.2 C21.1 C94.2 IC1.8 L1.2 Q1.3 R19.2 R22.2 R39.1 U10.13 | length 66.8
  Top Layer w0.203: C20.2@-39.262,27.783 -39.045,27.566 U10.13@-39.045,25.765 ; C94.2@-38.68,12.98 -38.694,12.967 R19.2@-38.694,12.25 -37.712,12.25 v1(-37.694,12.268) ; IC1.8@-31.07,20.503 -29.211,20.503 R39.1@-29.056,20.658
  Top Layer w0.635: R22.2@-7.62,17.374 -7.137,17.374 -7.01,17.247 v1(-7.01,16.408) Q1.3@-7.01,15.291
  Top Layer w1: v1(-32.487,20.523) -32.467,20.503 IC1.8@-31.07,20.503
  Bottom Layer w0.203: v1(-37.694,12.268) -37.694,13.306 C21.1@-37.653,13.347
  Bottom Layer w0.635: v1(-32.487,20.523) -32.398,20.612 -25.675,20.612 -25.195,20.132 -24.116,20.132 -24.114,20.134 -24.097,20.134 -24.095,20.132 -23.016,20.132 -23.014,20.134 -22.997,20.134 -22.995,20.132 -21.916,20.132 -21.914,20.134 -21.897,20.134 -21.895,20.132 -20.816,20.132 -20.814,20.134 -20.797,20.134 -20.795,20.132 -19.716,20.132 -19.714,20.134 -15.797,20.134 -15.051,19.388 -8.593,19.388 -7.01,17.805 v1(-7.01,16.408)
  Bottom Layer w1: v1@-39.065,26.822 -40.538,26.822 -41.732,25.629 -41.732,20.32 ; C21.1@-37.653,13.347 -39.712,13.347 L1.2@-40.256,13.89 -40.256,16.481 -41.732,17.958 -41.732,20.32 ; v1(-32.487,20.523) -41.529,20.523 -41.732,20.32
  other v1: -39.014,26.645 -39.472,27.051 -38.964,27.153
*DIN1: P4.6 R3.2 R82.1 | length 11.9
  Top Layer w0.203: R3.2@-19.685,23.19 R82.1@-18.745,23.19 -18.745,18.22 -17.924,17.399 -16.036,17.399 -15.164,16.527 v1(-15.164,16.129)
  Bottom Layer w0.203: v1(-15.164,16.129) -15.164,14.817 P4.6@-15.136,14.79
*DIN2: P4.5 R83.2 | length 1.7
  Bottom Layer w0.203: R83.2@-17.678,16.485 -17.676,16.483 P4.5@-17.676,14.79
*DOUT1: P4.4 U3.10 | length 10.8
  Top Layer w0.5: v2(-26.797,18.136) -25.783,17.122 -25.783,16.208
  Bottom Layer w0.5: v2(-26.797,18.136) -26.277,17.616 -23.229,17.616 -21.857,16.243 -21.819,16.243 -21.553,15.978 -21.553,15.178 -21.165,14.79 P4.4@-20.216,14.79
*DOUT2: P4.3 U3.11 | length 4.5
  Top Layer w0.5: U3.11@-24.513,15.349 -24.486,15.377 v2(-24.486,16.662)
  Bottom Layer w0.5: v2(-24.486,16.662) -23.47,16.662 -22.756,15.949 P4.3@-22.756,14.79
*RFID_CLK: R22.1 R23.2 U3.12 | length 21.5
  Top Layer w0.203: U3.12@-23.243,15.349 -23.243,16.685 -22.885,17.043 -22.701,17.043 -22.096,17.648 -21.287,17.648 -20.066,16.427 -20.066,14.448 -19.863,14.244 -14.813,14.244 -13.64,15.418 -13.64,16.942 -12.624,17.958 -9.881,17.958 R23.2@-9.296,17.374 R22.1@-8.687,17.374
*RFID_DEMOD: IC1.7 R40.2 R41.1 U3.4 | length 17.7
  Top Layer w0.203: R41.1@-32.536,15.358 -32.566,15.389 R40.2@-33.176,15.389 -33.176,18.767 -32.71,19.233 IC1.7@-31.07,19.233 v1(-29.927,19.233) ; v1(-24.841,18.796) -24.325,18.28 -23.816,18.28 -23.798,18.263 -23.241,18.263 -21.973,19.53 U3.4@-21.973,20.549
  Bottom Layer w0.203: v1(-29.927,19.233) -29.385,19.233 -29.035,19.583 -26.101,19.583 -25.621,19.103 -25.149,19.103 v1(-24.841,18.796)
*RFID_GND: U3.3 U4.26 | length 43.7
  Top Layer w0.203: U3.3@-20.726,20.526 U3.3@-20.703,20.549 -20.703,22.019 -20.599,22.123 v1(-19.355,22.123) ; v1(-18.136,24.943) -17.78,24.943 -17.404,24.567 -12.187,24.567 v1(-11.836,24.917)
  Bottom Layer w0.203: v1(-19.355,22.123) -19.355,23.724 v1(-18.136,24.943) ; U4.26@-15.964,48.809 -15.964,44.823 -14.787,43.645 -9.755,43.645 -9.076,42.966 -9.076,40.454 -11.836,37.694 v1(-11.836,24.917)
ACCEL_EN: Q6.1 U4.4 | length 17.5
  Top Layer w0.203: Q6.1@-9.053,58.105 Q6.1@-9.053,58.115 ; Q6.1@-8.89,58.115 -8.89,58.699 -8.611,58.979 v1(-7.239,58.979)
  Bottom Layer w0.203: U4.4@-19.464,57.809 -19.518,57.863 -19.518,58.846 -19.782,59.109 -19.782,59.61 -19.347,60.046 -8.306,60.046 v1(-7.239,58.979)
ACCEL_VCC: C5.2 C14.2 Q6.3 U5.3 U5.9 | length 10.9
  Top Layer w0.203: C14.2@-14.961,58.903 -14.484,58.426 U5.9@-14.484,57.809 -14.484,56.355 -13.984,55.855 ; C5.2@-13.984,53.86 U5.3@-13.984,54.909 -13.984,55.855 ; Q6.3@-11.303,59.055 -11.303,56.576 -12.025,55.855 -13.984,55.855
ACCL_INT: U4.20 U5.5 | length 9.2
  Top Layer w0.203: U5.5@-12.984,54.909 -12.984,54.051 -12.831,53.899 v1(-9.474,53.899)
  Bottom Layer w0.203: U4.20@-13.714,52.559 -13.056,52.559 -12.326,53.289 -10.061,53.289 -9.703,53.647 -9.703,53.67 v1(-9.474,53.899)
AMP1: C37.2 C38.2 D3.1 D6.2 IC1.3 R26.1 | length 40.4
  Top Layer w0.203: IC1.3@-37.039,17.963 -35.845,17.963 ; v1(-35.56,19.507) -35.509,19.456 -35.509,18.288 -35.834,17.963 -35.845,17.963 ; R26.1@-34.705,15.378 -34.713,15.386 C38.2@-35.647,15.386 -35.647,16.001 -35.438,16.209 -35.438,17.557 -35.845,17.963 ; v1(-14.529,18.009) -14.752,18.232 -17.005,18.232 -17.202,18.429 -17.202,21.388 D3.1@-15.99,22.6 -15.99,22.581 -12.497,22.581 -12.168,22.252 C37.2@-12.168,22.073
  Bottom Layer w0.203: v1(-35.56,19.507) -35.349,19.718 -30.297,19.718 -30.026,19.99 -25.933,19.99 -25.453,19.51 -16.053,19.51 -14.552,18.009 v1(-14.529,18.009)
AMP2: C39.2 IC1.1 R36.1 | length 2.9
  Top Layer w0.203: C39.2@-39.46,19.788 -39.46,20.154 -39.11,20.503 IC1.1@-37.039,20.503
ATN: C63.2 R78.1 U12.39 | length 2.8
  Bottom Layer w0.203: R78.1@-31.553,37.319 R78.1@-31.477,37.319
  Bottom Layer w0.66: R78.1@-31.496,37.338 -31.477,37.319 U12.39@-28.786,37.319
CC_UART_RX: R60(NA).1 U4.21 U20.18 | length 32
  Bottom Layer w0.203: U4.21@-13.714,52.059 -12.981,52.059 -12.234,52.807 -9.178,52.807 -9.127,52.756 -8.626,52.756 -8.22,52.756 -7.788,52.324 -3.159,52.324 -2.057,53.426 -2.057,55.102 -1.051,56.109 3.759,56.109 4.627,55.24 4.627,46.351 4.062,45.785 U20.18@3.491,45.785
CC_UART_TX: R61(NA).1 U4.22 U20.17 | length 24.4
  Top Layer w0.203: v1(-12.217,51.765) -11.994,51.541 -8.403,51.541 v1(-8.204,51.74)
  Bottom Layer w0.203: U4.22@-13.714,51.559 -12.551,51.559 v1@-12.328,51.782 ; v1@-12.217,51.782 -11.615,51.782 ; v1@-8.077,51.867 -8.057,51.887 3.586,51.887 4.221,51.253 4.221,46.519 3.987,46.285 U20.17@3.491,46.285
DBG_CLK: P3.3 R61(NA).2 U20.34 | length 16.6
  Top Layer w0.203: v1(-12.903,49.733) -12.785,49.615 -11.167,49.615 -10.915,49.867 P3.3@-10.915,50.57
  Bottom Layer w0.203: v1@-12.802,49.647 -12.802,48.498 -10.828,46.525 -3.269,46.525 -3.029,46.285 U20.34@-2.459,46.285 ; P3.3@-10.915,50.57 -10.915,51.415 -10.548,51.782
DBG_DATA: P3.4 U20.35 | length 12.5
  Bottom Layer w0.203: P3.4@-12.185,50.57 -12.185,48.456 -10.66,46.931 -3.101,46.931 -2.955,46.785 U20.35@-2.459,46.785
DIN1: U3.16 U4.40 | length 46.4
  Top Layer w0.203: v1(-27.153,22.86) -27.153,22.606 -26.411,21.865 -26.411,19.511 -24.774,17.874 -23.984,17.874 -23.967,17.856 -23.073,17.856 -22.463,18.466 -20.955,18.466 -19.025,16.535 -18.263,16.535 -18.163,16.436 U3.16@-18.163,15.349
  Bottom Layer w0.203: v1(-27.153,22.86) -27.153,23.149 -25.832,24.47 -25.832,28.965 -26.035,29.169 -26.035,43.856 -24.028,45.863 -24.028,51.478 -23.515,51.991 -22.782,51.991 U4.40@-22.714,52.059
DIN2: U3.15 U4.41 | length 49.9
  Top Layer w0.203: v1(-29.82,22.479) -29.82,22.007 -29.426,21.613 -28.471,21.613 -27.813,20.955 -27.813,19.828 -26.954,18.969 -26.444,18.969 -24.942,17.467 -24.152,17.467 -24.135,17.45 -22.869,17.45 -22.26,18.059 -21.123,18.059 -19.482,16.418 -19.482,16.183 -19.433,16.135 U3.15@-19.433,15.349
  Bottom Layer w0.203: v1(-29.82,22.479) -28.431,22.479 -26.348,24.562 -26.314,24.562 -26.238,24.638 -26.238,28.797 -26.441,29 -26.441,44.025 -24.435,46.031 -24.435,51.646 -23.522,52.559 U4.41@-22.714,52.559
FL_CS: U4.14 U13.1 | length 10.1
  Bottom Layer w0.203: U4.14@-13.714,55.559 -13.056,55.559 -12.808,55.807 -7.617,55.807 -5.682,57.742 U13.1@-4.499,57.742